# Altium PCB PCB2.pcbdoc
Units mil, origin at the board's own origin, x right, y up, seen from the top; angles counter-clockwise.
Board outline 12348.58 x 5931.26 mil, 2 copper layers (Top Layer, Bottom Layer); 75 components, 20 nets, 410 pads, 2 vias.
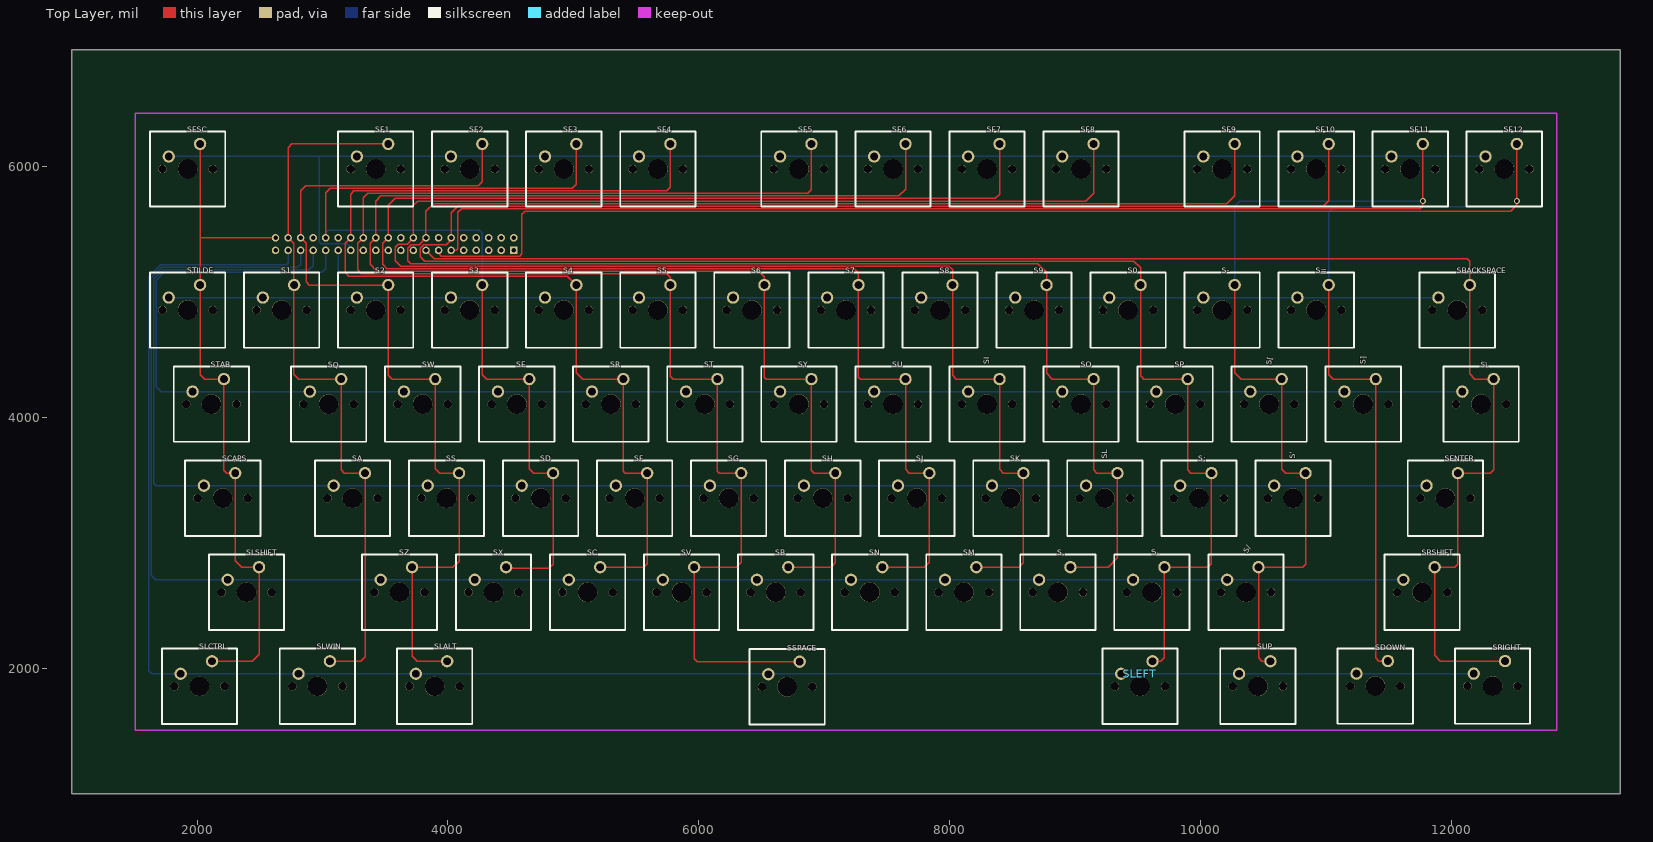
[diagram p0: Top Layer view]
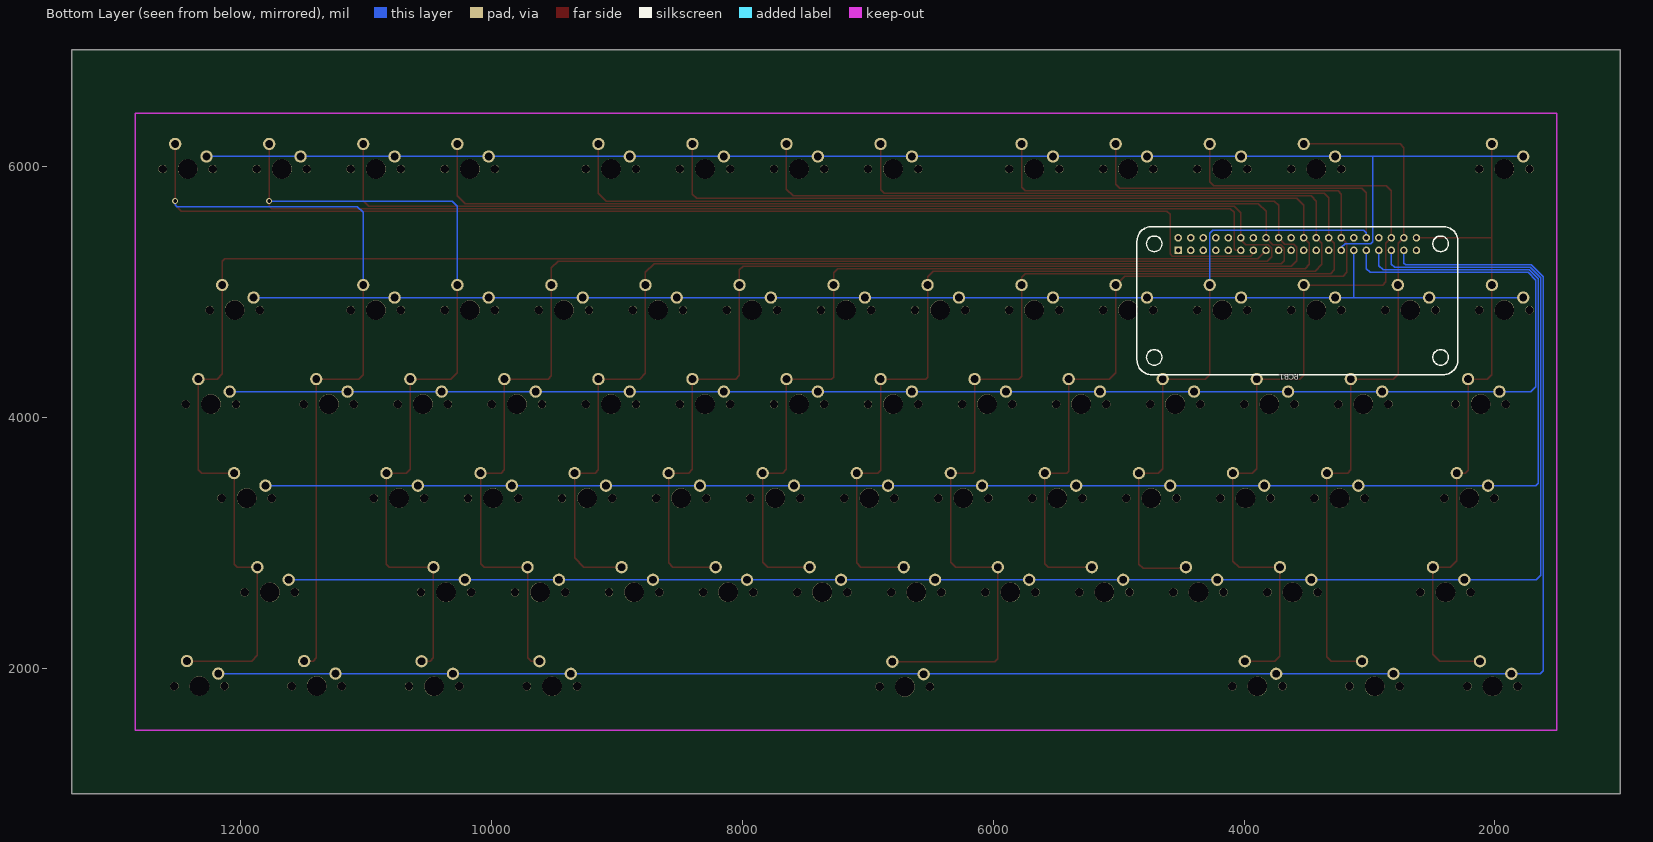
[diagram p1: Bottom Layer view, seen from below]

## Layer stack, top to bottom
Top Solder: solder mask 0.4, Solder Resist, Dk 3.5
Top Layer: signal copper 1.4
Dielectric1: dielectric 12.6, FR-4, Dk 4.8
Bottom Layer: signal copper 1.4
Bottom Solder: solder mask 0.4, Solder Resist, Dk 3.5

## Board outline
13348.58,1000 1000,1000 1000,6931.26 13348.58,6931.26

## Design rules (kind name [scope] priority, off if disabled: settings)
AssemblyTestPointUsage [All] p0: scope1count=1 scope1_0_kind=Board scope1_0_value=Board scope2count=1 scope2_0_kind=Board scope2_0_value=Board commentlength=0
AssemblyTestpoint [All] p0: scope1count=1 scope1_0_kind=Board scope1_0_value=Board scope2count=1 scope2_0_kind=Board scope2_0_value=Board commentlength=0
Clearance [All] p0: scope1count=1 scope1_0_kind=Board scope1_0_value=Board scope2count=1 scope2_0_kind=Board scope2_0_value=Board commentlength=0 gap=10
Clearance [All] p1: gap=10 ignorepadtopadclearanceinfootprint=FALSE except(0: Arc-Hole Track-Hole SMDPad-Hole THPad-Hole Via-Hole Fill-Hole Poly-Hole Region-Hole Text-Hole)
ComponentClearance [All] p0: scope1count=1 scope1_0_kind=Board scope1_0_value=Board scope2count=1 scope2_0_kind=Board scope2_0_value=Board commentlength=0 gap=10 collisioncheckmode=3
DiffPairsRouting [All] p0: scope1count=1 scope1_0_kind=Board scope1_0_value=Board scope2count=1 scope2_0_kind=Board scope2_0_value=Board commentlength=0
FabricationTestPointUsage [All] p0: scope1count=1 scope1_0_kind=Board scope1_0_value=Board scope2count=1 scope2_0_kind=Board scope2_0_value=Board commentlength=0 valid=0 allowmultiple=FALSE
FabricationTestpoint [All] p0: scope1count=1 scope1_0_kind=Board scope1_0_value=Board scope2count=1 scope2_0_kind=Board scope2_0_value=Board commentlength=0 side=3 testpointundercomponent=TRUE minsize=40 maxsize=100 preferedsize=60 minholesize=0 maxholesize=40 preferedholesize=32 testpointgrid=1
FanoutControl Fanout_Default [All] p0: scope1count=1 scope1_0_kind=Board scope1_0_value=Board scope2count=1 scope2_0_kind=Board scope2_0_value=Board commentlength=30 // Fanout_Default (Default Rule)
FanoutControl Fanout_Small [All] p0 off: scope1count=1 scope1_0_kind=Board scope1_0_value=Board scope2count=1 scope2_0_kind=Board scope2_0_value=Board commentlength=84 // Protel DXP Scope 1 Expression Was: (CompPinCount < 5)   Fanout_Small (Default Rule)
FanoutControl Fanout_SOIC [All] p0 off: scope1count=1 scope1_0_kind=Board scope1_0_value=Board scope2count=1 scope2_0_kind=Board scope2_0_value=Board commentlength=71 // Protel DXP Scope 1 Expression Was: IsSOIC   Fanout_SOIC (Default Rule)
FanoutControl Fanout_LCC [All] p0 off: scope1count=1 scope1_0_kind=Board scope1_0_value=Board scope2count=1 scope2_0_kind=Board scope2_0_value=Board commentlength=69 // Protel DXP Scope 1 Expression Was: IsLCC   Fanout_LCC (Default Rule)
FanoutControl Fanout_BGA [All] p0 off: scope1count=1 scope1_0_kind=Board scope1_0_value=Board scope2count=1 scope2_0_kind=Board scope2_0_value=Board commentlength=69 // Protel DXP Scope 1 Expression Was: IsBGA   Fanout_BGA (Default Rule)
Height [All] p0: scope1count=1 scope1_0_kind=Board scope1_0_value=Board scope2count=1 scope2_0_kind=Board scope2_0_value=Board commentlength=0
HoleSize [All] p0: scope1count=1 scope1_0_kind=Board scope1_0_value=Board scope2count=1 scope2_0_kind=Board scope2_0_value=Board commentlength=0 absolutevalues=TRUE maxlimit=100 minlimit=1 maxpercent=80.000 minpercent=20.000
HoleToHoleClearance [All] p0: scope1count=1 scope1_0_kind=Board scope1_0_value=Board scope2count=1 scope2_0_kind=Board scope2_0_value=Board commentlength=0
LayerPairs [All] p0: scope1count=1 scope1_0_kind=Board scope1_0_value=Board scope2count=1 scope2_0_kind=Board scope2_0_value=Board commentlength=0 enforce=TRUE
MinimumSolderMaskSliver [All] p0: scope1count=1 scope1_0_kind=Board scope1_0_value=Board scope2count=1 scope2_0_kind=Board scope2_0_value=Board commentlength=0
NetAntennae [All] p0: scope1count=1 scope1_0_kind=Board scope1_0_value=Board scope2count=1 scope2_0_kind=Board scope2_0_value=Board commentlength=0
PasteMaskExpansion [All] p0: scope1count=1 scope1_0_kind=Board scope1_0_value=Board scope2count=1 scope2_0_kind=Board scope2_0_value=Board commentlength=0 expansion=0
PlaneClearance [All] p0: scope1count=1 scope1_0_kind=Board scope1_0_value=Board scope2count=1 scope2_0_kind=Board scope2_0_value=Board commentlength=0 clearance=20
PlaneConnect [All] p0: scope1count=1 scope1_0_kind=Board scope1_0_value=Board scope2count=1 scope2_0_kind=Board scope2_0_value=Board commentlength=0 planeconnectstyle=Relief reliefexpansion=20 reliefentries=4 reliefconductorwidth=10 reliefairgap=10
PolygonConnect [All] p0: scope1count=1 scope1_0_kind=Board scope1_0_value=Board scope2count=1 scope2_0_kind=Board scope2_0_value=Board commentlength=0 connectstyle=Relief reliefconductorwidth=10 reliefentries=4 polygonreliefangle="90 Angle"
PolygonConnect [All] p1: connectstyle=Relief reliefconductorwidth=10 reliefentries=4 polygonreliefangle="90 Angle" airgapwidth=10
RoutingCorners [All] p0: scope1count=1 scope1_0_kind=Board scope1_0_value=Board scope2count=1 scope2_0_kind=Board scope2_0_value=Board commentlength=0 cornerstyle=45-Degree minsetback=100 maxsetback=100
RoutingLayers [All] p0: scope1count=1 scope1_0_kind=Board scope1_0_value=Board scope2count=1 scope2_0_kind=Board scope2_0_value=Board commentlength=0 top layer=Automatic bottom layer=Automatic
RoutingPriority [All] p0: scope1count=1 scope1_0_kind=Board scope1_0_value=Board scope2count=1 scope2_0_kind=Board scope2_0_value=Board commentlength=0
RoutingTopology [All] p0: scope1count=1 scope1_0_kind=Board scope1_0_value=Board scope2count=1 scope2_0_kind=Board scope2_0_value=Board commentlength=0 topology=Shortest
RoutingVias [All] p0: scope1count=1 scope1_0_kind=Board scope1_0_value=Board scope2count=1 scope2_0_kind=Board scope2_0_value=Board commentlength=0 holewidth=28 width=50 viastyle="Through Hole" minholewidth=28 minwidth=50 maxholewidth=28 maxwidth=50
RoutingVias [All] p1: holewidth=28 width=50 viastyle="Through Hole" minholewidth=28 minwidth=50 maxholewidth=28 maxwidth=50
ShortCircuit [All] p0: scope1count=1 scope1_0_kind=Board scope1_0_value=Board scope2count=1 scope2_0_kind=Board scope2_0_value=Board commentlength=0 allowed=FALSE
SilkToBoardRegionClearance [All] p0: scope1count=1 scope1_0_kind=Board scope1_0_value=Board scope2count=1 scope2_0_kind=Board scope2_0_value=Board commentlength=0
SilkToSilkClearance [All] p0: scope1count=1 scope1_0_kind=Board scope1_0_value=Board scope2count=1 scope2_0_kind=Board scope2_0_value=Board commentlength=0
SilkToSolderMaskClearance [All] p0 off: scope1count=1 scope1_0_kind=Board scope1_0_value=Board scope2count=1 scope2_0_kind=Board scope2_0_value=Board commentlength=44 // Protel DXP Scope 1 Expression Was: IsPad
SolderMaskExpansion [All] p0: scope1count=1 scope1_0_kind=Board scope1_0_value=Board scope2count=1 scope2_0_kind=Board scope2_0_value=Board commentlength=0 expansion=4
SolderMaskExpansion [All] p1: expansion=4
UnRoutedNet [All] p0: scope1count=1 scope1_0_kind=Board scope1_0_value=Board scope2count=1 scope2_0_kind=Board scope2_0_value=Board commentlength=0
UnpouredPolygon [All] p0: scope1count=1 scope1_0_kind=Board scope1_0_value=Board scope2count=1 scope2_0_kind=Board scope2_0_value=Board commentlength=0
Width [All] p0: scope1count=1 scope1_0_kind=Board scope1_0_value=Board scope2count=1 scope2_0_kind=Board scope2_0_value=Board commentlength=0 maxlimit=10 minlimit=10 preferedwidth=10
Width [All] p1: maxlimit=10 minlimit=10 preferedwidth=10
30 further rules are at their usual default settings.

## Components (designator, comment, footprint, x,y, rotation, side; value= is the part's Value field where it differs from the comment)
PCB1 "树莓派 zero w BCM编码引脚" "RASPBERRY PI ZERO (FACE UP) OUTLINE" 2295,5521.26 r180 bottom
S0 "MX1A" MX1A 6330,9261.26 r0 top
S1 "MX1A" MX1A -420,9261.26 r0 top
S2 "MX1A" MX1A 330,9261.26 r0 top
S3 "MX1A" MX1A 1080,9261.26 r0 top
S4 "MX1A" MX1A 1830,9261.26 r0 top
S5 "MX1A" MX1A 2580,9261.26 r0 top
S6 "MX1A" MX1A 3330,9261.26 r0 top
S7 "MX1A" MX1A 4080,9261.26 r0 top
S8 "MX1A" MX1A 4830,9261.26 r0 top
S9 "MX1A" MX1A 5580,9261.26 r0 top
S' "MX1A" MX1A 7645,7761.26 r0 top
S, "MX1A" MX1A 5770,7011.26 r0 top
S- "MX1A" MX1A 7080,9261.26 r0 top
S. "MX1A" MX1A 6520,7011.26 r0 top
S/ "MX1A" MX1A 7270,7011.26 r0 top
S; "MX1A" MX1A 6895,7761.26 r0 top
S= "MX1A" MX1A 7830,9261.26 r0 top
S[ "MX1A" MX1A 7455,8511.26 r0 top
S\ "MX1A" MX1A 9145,8511.26 r0 top
S] "MX1A" MX1A 8205,8511.26 r0 top
SA "MX1A" MX1A 145,7761.26 r0 top
SB "MX1A" MX1A 3520,7011.26 r0 top
SBACKSPACE "MX1A" MX1A 8955,9261.26 r0 top
SC "MX1A" MX1A 2020,7011.26 r0 top
SCAPS "MX1A" MX1A -890,7761.26 r0 top
SD "MX1A" MX1A 1645,7761.26 r0 top
SDOWN "MX1A" MX1A_NO3D 11395,1856.26 r0 top
SE "MX1A" MX1A 1455,8511.26 r0 top
SENTER "MX1A" MX1A 8860,7761.26 r0 top
SESC "MX1A" MX1A -1170,10386.26 r0 top
SF "MX1A" MX1A 2395,7761.26 r0 top
SF1 "MX1A" MX1A 330,10386.26 r0 top
SF2 "MX1A" MX1A 1080,10386.26 r0 top
SF3 "MX1A" MX1A 1830,10386.26 r0 top
SF4 "MX1A" MX1A 2580,10386.26 r0 top
SF5 "MX1A" MX1A 3705,10386.26 r0 top
SF6 "MX1A" MX1A 4455,10386.26 r0 top
SF7 "MX1A" MX1A 5205,10386.26 r0 top
SF8 "MX1A" MX1A 5955,10386.26 r0 top
SF9 "MX1A" MX1A 7080,10386.26 r0 top
SF10 "MX1A" MX1A 7830,10386.26 r0 top
SF11 "MX1A" MX1A 8580,10386.26 r0 top
SF12 "MX1A" MX1A 9330,10386.26 r0 top
SG "MX1A" MX1A 3145,7761.26 r0 top
SH "MX1A" MX1A 3895,7761.26 r0 top
SI "MX1A" MX1A 5205,8511.26 r0 top
SJ "MX1A" MX1A 4645,7761.26 r0 top
SK "MX1A" MX1A 5395,7761.26 r0 top
SL "MX1A" MX1A 6145,7761.26 r0 top
SLALT "MX1A" MX1A 800,6261.26 r0 top
SLCTRL "MX1A" MX1A -1075,6261.26 r0 top
SLEFT "MX1A" MX1A 6425,6261.26 r0 top
SLSHIFT "MX1A" MX1A -700,7011.26 r0 top
SLWIN "MX1A" MX1A -135,6261.26 r0 top
SM "MX1A" MX1A 5020,7011.26 r0 top
SN "MX1A" MX1A 4270,7011.26 r0 top
SO "MX1A" MX1A 5955,8511.26 r0 top
SP "MX1A" MX1A 6705,8511.26 r0 top
SQ "MX1A" MX1A -45,8511.26 r0 top
SR "MX1A" MX1A 2205,8511.26 r0 top
SRIGHT "MX1A" MX1A_NO3D 12330,1856.26 r0 top
SRSHIFT "MX1A" MX1A 8675,7011.26 r0 top
SS "MX1A" MX1A 895,7761.26 r0 top
SSPACE "MX1A" MX1A_NO3D 6705,1851.26 r0 top
ST "MX1A" MX1A 2955,8511.26 r0 top
STAB "MX1A" MX1A -980,8511.26 r0 top
STILDE "MX1A" MX1A -1170,9261.26 r0 top
SU "MX1A" MX1A 4455,8511.26 r0 top
SUP "MX1A" MX1A 7365,6261.26 r0 top
SV "MX1A" MX1A 2770,7011.26 r0 top
SW "MX1A" MX1A 705,8511.26 r0 top
SX "MX1A" MX1A 1270,7011.26 r0 top
SY "MX1A" MX1A 3705,8511.26 r0 top
SZ "MX1A" MX1A 520,7011.26 r0 top

## Footprints (in the part's own frame and the unit in brackets; to place one, negate y for a bottom-side part, rotate by r counter-clockwise, add the part's x,y. Pads: shape width x height; smd on the part's side, far side on the other; paste and mask are expansions set on the pad)
MX1A [mil]
  round 98.4 hole 59.1 slot 59.3 at 0 deg: 1(2943.79,-4306.29) 2(3193.79,-4206.29)
  round 66.9 hole 66.9 unplated: ""(2893.79,-4406.29) ""(3293.79,-4406.29)
  round 156.7 hole 156.7 unplated: ""(3093.79,-4406.29)
  silkscreen extent 2794,-4706 3394,-4106
MX1A_NO3D [mil]
  round 98.4 hole 59.1 slot 59.3 at 0 deg: 1(-150,100) 2(100,200)
  round 66.9 hole 66.9 unplated: ""(-200,0) ""(200,0)
  round 156.7 hole 156.7 unplated: ""(0,0)
  silkscreen extent -300,-300 300,300
"RASPBERRY PI ZERO (FACE UP) OUTLINE" [mil]
  rect 60x60 hole 36: 1(-2230,-190)
  round 60 hole 36: 2(-2230,-90) 3(-2130,-190) 4(-2130,-90) 5(-2030,-190) 6(-2030,-90) 7(-1930,-190) 8(-1930,-90) 9(-1830,-190) 10(-1830,-90) 11(-1730,-190) 12(-1730,-90) 13(-1630,-190) 14(-1630,-90) 15(-1530,-190) 16(-1530,-90) 17(-1430,-190) 18(-1430,-90) 19(-1330,-190) 20(-1330,-90) 21(-1230,-190) 22(-1230,-90) 23(-1130,-190) 24(-1130,-90) 25(-1030,-190) 26(-1030,-90) 28(-930,-90) 29(-830,-190) 30(-830,-90) 31(-730,-190) 32(-730,-90) 33(-630,-190) 34(-630,-90) 35(-530,-190) 36(-530,-90) 37(-430,-190) 38(-430,-90) 39(-330,-190) 40(-330,-90)
  round 60 hole 36 paste+0: 27(-930,-190)
  silkscreen extent -2559,-1181 0,0

## Via types
v1: diameter 50, hole 28, Top Layer to Bottom Layer, 2 vias

## Nets (pads, with @x,y where several pads share a name; then routed paths per layer and width w, separated by ;. In a path a pad name is that pad's centre, name@x,y a point inside that pad or via, vN(x,y) a via of type N, cw(c..) or ccw(c..) an arc to the next point about the centre after c; other vN are vias at no path point)
COL1: PCB1.40 SCAPS.2 SESC.2 SLCTRL.2 SLSHIFT.2 STAB.2 STILDE.2 | length 5474.7
  Top Layer w10: SESC.2 STILDE.2 2023.79,4341.21 2060.03,4304.97 STAB.2 2213.79,3576.21 2235.03,3554.97 SCAPS.2 2303.79,2856.21 2355.03,2804.97 SLSHIFT.2 2493.79,2108.79 2439.97,2054.97 SLCTRL.2 ; 2025.05,5431.26 PCB1.40
COL2: PCB1.38 S1.2 SA.2 SF1.2 SLWIN.2 SQ.2 | length 5715
  Top Layer w10: SLWIN.2 3304.97,2054.97 3338.79,2088.79 SA.2 3175.03,3554.97 3148.79,3581.21 SQ.2 2810.03,4304.97 2770,4345 2770,5386.26 PCB1.38 2725,6150 2754.97,6179.97 SF1.2
COL3: PCB1.36 S2.2 SF2.2 SLALT.2 SS.2 SW.2 SZ.2 | length 7316
  Top Layer w10: SLALT.2 3755.03,2054.97 3713.79,2096.21 SZ.2 4039.97,2804.97 4088.79,2853.79 SS.2 3935.03,3554.97 3898.79,3591.21 SW.2 3555.03,4304.97 3523.79,4336.21 S2.2 2895.03,5054.97 2870,5080 2870,5386.26 PCB1.36 2825,5805 2865,5845 4240,5845 4273.79,5878.79 SF2.2
COL4: PCB1.32 S3.2 SD.2 SE.2 SF3.2 SX.2 | length 7564.9
  Top Layer w10: PCB1.32@3038.74,5431.26 PCB1.32 3025,5790 3060,5825 4990,5825 5025,5860 SF3.2@5025,6178.76 ; S3.2 4273.79,4341.21 4310.03,4304.97 SE.2 4648.79,3591.21 4685.03,3554.97 SD.2 4838.79,2828.79 4805,2795 SX.2@4473.76,2795
  Bottom Layer w10: PCB1.32 3025,5470 3045,5490 4250,5490 4273.79,5466.21 S3.2
COL5: PCB1.28 S4.2 SC.2 SF4.2 SF.2 SR.2 | length 8579.7
  Top Layer w10: SC.2 5559.97,2804.97 5588.79,2833.79 SF.2 5415.03,3554.97 5398.79,3571.21 SR.2 5075.03,4304.97 5023.79,4356.21 S4.2 4952.5,5126.26 3208.74,5126.26 3180,5155 3180,5386.26 PCB1.28 3225,5780 3250,5805 5745,5805 5773.79,5833.79 SF4.2
COL6: PCB1.26 S5.2 SF5.2 SG.2 SSPACE.2 ST.2 SV.2 | length 11865.1
  Top Layer w10: SSPACE.2 6804.95,2051.21 5988.79,2051.21 5963.79,2076.21 SV.2 6299.97,2804.97 6338.79,2843.79 SG.2 6165.03,3554.97 6148.79,3571.21 ST.2 5795.03,4304.97 5773.79,4326.21 S5.2 5773.79,5116.21 5743.74,5146.26 3308.74,5146.26 3280,5175 3280,5386.26 PCB1.26 3325,5750 3360,5785 6870,5785 6898.79,5813.79 SF5.2
COL7: PCB1.24 S6.2 SB.2 SF6.2 SH.2 SY.2 | length 11546.6
  Top Layer w10: SB.2 7054.97,2804.97 7088.79,2838.79 SH.2 6920.03,3554.97 6898.79,3576.21 SY.2 6540.03,4304.97 6523.79,4321.21 S6.2 6523.79,5121.21 6478.74,5166.26 3433.74,5166.26 3380,5220 3380,5386.26 PCB1.24 3425,5725 3465,5765 7595,5765 7648.79,5818.79 SF6.2
COL8: PCB1.22 S7.2 SF7.2 SJ.2 SN.2 SU.2 | length 12858.4
  Top Layer w10: SN.2 7799.97,2804.97 7838.79,2843.79 SJ.2 7680.03,3554.97 7648.79,3586.21 SU.2 7290.03,4304.97 7273.79,4321.21 S7.2 7273.79,5151.21 7238.74,5186.26 3513.74,5186.26 3480,5220 3480,5386.26 PCB1.22 3525,5690 3580,5745 8365,5745 8398.79,5778.79 SF7.2
COL9: PCB1.18 S8.2 SF8.2 SI.2 SK.2 SM.2 | length 14126.2
  Top Layer w10: SM.2 8555,2804.97 8588.79,2838.76 SK.2 8430.03,3554.97 8398.79,3586.21 SI.2 8055.03,4304.97 8023.79,4336.21 S8.2 8023.79,5177.47 7995,5206.26 3623.74,5206.26 3580,5250 3580,5355 3605,5380 3673.74,5380 PCB1.18 3725,5690 3760,5725 9085,5725 9148.79,5788.79 SF8.2
COL10: PCB1.16 S9.2 S,.2 SF9.2 SL.2 SO.2 | length 15741.8
  Top Layer w10: 8963.79,2804.97 9264.97,2804.97 9338.79,2878.79 SL.2 9175.03,3554.97 9148.79,3581.21 SO.2 8820.03,4304.97 8775,4350 8775,5155 8703.74,5226.26 3703.74,5226.26 3680,5250 3680,5349.9 3706.36,5376.26 3770,5376.26 PCB1.16 3825,5645 3885,5705 10210,5705 10273.79,5768.79 SF9.2
COL11: PCB1.12 S0.2 S..2 S;.2 SF10.2 SLEFT.2 SP.2 | length 17935.1
  Top Layer w10: SLEFT.2 9684.97,2054.97 9713.79,2083.79 S..2 10059.97,2804.97 10088.79,2833.79 10088.79,3554.97 9925.03,3554.97 9898.79,3581.21 SP.2 9550.03,4304.97 9523.79,4331.21 S0.2 9523.79,5191.21 9468.74,5246.26 3813.74,5246.26 3780,5280 3780,5349.9 3806.36,5376.26 3986.26,5376.26 4025,5415 PCB1.12 4025,5630 4080,5685 10980,5685 11023.79,5728.79 SF10.2
COL12: PCB1.11 S'.2 S-.2 S/.2 S[.2 SF11.2 SUP.2 | length 14665.3
  Top Layer w10: PCB1.11 4066.26,5331.26 4080,5345 4080,5635 4110,5665 11755,5665 11773.79,5683.79 SF11.2 ; S-.2 10273.79,4356.21 10325.03,4304.97 S[.2 10648.79,3586.21 10680.03,3554.97 S'.2 10838.79,2828.79 10814.97,2804.97 S/.2 10463.79,2081.21 10490.03,2054.97 SUP.2
  Bottom Layer w10: S-.2 10273.79,5683.79 10315,5725 v1(11775,5725)
COL13: PCB1.13 S=.2 S].2 SDOWN.2 SF12.2 | length 15016.6
  Top Layer w10: PCB1.13@3925,5307.52 3946.26,5286.26 4571.26,5286.26 4590,5305 4590,5620 4615,5645 12475,5645 12523.79,5693.79 SF12.2 ; S=.2 11023.79,4341.21 11060.03,4304.97 S].2 11398.79,2081.21 11423.74,2056.26 SDOWN.2
  Bottom Layer w10: S=.2 11023.79,5633.79 11070,5680 12510,5680 12525,5695 v1(12525,5725)
COL14: PCB1.15 S\.2 SBACKSPACE.2 SENTER.2 SRIGHT.2 SRSHIFT.2 | length 12688.9
  Top Layer w10: PCB1.15 3890,5266.26 12128.74,5266.26 12148.79,5246.21 SBACKSPACE.2 12148.79,4346.21 12190.03,4304.97 S\.2 12338.79,3583.79 12309.97,3554.97 SENTER.2 12053.79,2828.79 12029.97,2804.97 SRSHIFT.2 11868.79,2101.21 11913.74,2056.26 SRIGHT.2
ROW1: PCB1.29 S0.1 S1.1 S2.1 S3.1 S4.1 S5.1 S6.1 S7.1 S8.1 S9.1 S-.1 S=.1 SBACKSPACE.1 STILDE.1 | length 10501.3
  Bottom Layer w10: STILDE.1 S1.1 3125,4954.97 ; PCB1.29 3125,4954.97 ; SBACKSPACE.1 S=.1 S-.1 S0.1 S9.1 S8.1 S7.1 S6.1 S5.1 S4.1 S3.1 S2.1 3125,4954.97
ROW2: PCB1.31 S[.1 S\.1 S].1 SE.1 SI.1 SO.1 SP.1 SQ.1 SR.1 ST.1 STAB.1 SU.1 SW.1 SY.1 | length 12813.9
  Bottom Layer w10: PCB1.31 3025,5185 2995,5155 1735,5155 1675,5095 1675,4245 1715.03,4204.97 STAB.1 SQ.1 SW.1 SE.1 SR.1 ST.1 SY.1 SU.1 SI.1 SO.1 SP.1 S[.1 S].1 S\.1
ROW3: PCB1.33 S'.1 S;.1 SA.1 SCAPS.1 SD.1 SENTER.1 SF.1 SG.1 SH.1 SJ.1 SK.1 SL.1 SS.1 | length 13220.8
  Bottom Layer w10: PCB1.33 2925,5210 2890,5175 1726.72,5175 1655,5103.28 1655,3475 1675.03,3454.97 SCAPS.1 SA.1 SS.1 SD.1 SF.1 SG.1 SH.1 SJ.1 SK.1 SL.1 9838.79,3454.97 S'.1 SENTER.1
ROW4: PCB1.35 S,.1 S..1 S/.1 SB.1 SC.1 SLSHIFT.1 SM.1 SN.1 SRSHIFT.1 SV.1 SX.1 SZ.1 | length 13716
  Bottom Layer w10: PCB1.35 2825,5220 2800,5195 1718.43,5195 1635,5111.57 1635,2740 1670.03,2704.97 SLSHIFT.1 SZ.1 SX.1 SC.1 SV.1 SB.1 SN.1 SM.1 8713.79,2704.97 S..1 S/.1 SRSHIFT.1
ROW5: PCB1.37 SDOWN.1 SLALT.1 SLCTRL.1 SLEFT.1 SLWIN.1 SRIGHT.1 SSPACE.1 SUP.1 | length 14971.6
  Bottom Layer w10: PCB1.37 2725,5230 2710,5215 1710.15,5215 1615,5119.85 1615,1980 1638.74,1956.26 SDOWN.1 SRIGHT.1
ROWF: PCB1.27 SESC.1 SF1.1 SF2.1 SF3.1 SF4.1 SF5.1 SF6.1 SF7.1 SF8.1 SF9.1 SF10.1 SF11.1 SF12.1 | length 11472.3
  Bottom Layer w10: SESC.1 2975,6079.97 ; PCB1.27 3225,5355 3195,5385 2990,5385 2975,5400 2975,6079.97 ; SF12.1 SF11.1 SF10.1 SF9.1 SF8.1 SF7.1 SF6.1 SF5.1 SF4.1 SF3.1 SF2.1 SF1.1 2975,6079.97
pads on no net: PCB1.1 PCB1.2 PCB1.3 PCB1.4 PCB1.5 PCB1.6 PCB1.7 PCB1.8 PCB1.9 PCB1.10 PCB1.14 PCB1.17 PCB1.19 PCB1.20 PCB1.21 PCB1.23 PCB1.25 PCB1.30 PCB1.34 PCB1.39 S0. S1. S2. S3. S4. S5. S6. S7. S8. S9. S'. S,. S-. S.. S/. S;. S=. S[. S\. S]. SA. SB. SBACKSPACE. SC. SCAPS. SD. SDOWN. SE. SENTER. SESC. SF1. SF2. SF3. SF4. SF5. SF6. SF7. SF8. SF9. SF10. SF11. SF12. SF. SG. SH. SI. SJ. SK. SL. SLALT. SLCTRL. SLEFT. SLSHIFT. SLWIN. SM. SN. SO. SP. SQ. SR. SRIGHT. SRSHIFT. SS. SSPACE. ST. STAB. STILDE. SU. SUP. SV. SW. SX. SY. SZ.

## Keep-outs
Keep-Out Layer:
  lines w10: 1505,1505 12843.58,1505 12843.58,6426.26 1505,6426.26 1505,1505

## Silkscreen, mask and mechanical layers (free items; w line width, h text height)
Document:
  lines w0.1: 7173.29,3964.63 7175.29,3966.63